# EAGLE board CT_schematic (EAGLE 7.6.0)

Size 100 x 80 mm. Coordinates in mm from the lower left corner, seen from the top.
Outline: 0,0 100,0 100,80 0,80 0,0
Copper layers (1*16): Top 0.035mm / dielectric 1.5mm / Bottom 0.035mm
Design rules "default": minimum track width 10mil, minimum drill 24mil, track to track 8mil, track to pad 8mil, pad to pad 8mil, via to via 8mil, smd to smd 8mil, copper to edge 40mil, drill to drill 8mil, minimum pad ring 10mil, minimum via ring 8mil, stop-mask expansion 4mil, vias tented up to drill 0mil, thermal gap 10mil

## Footprints (pad centres in the part's own frame; a part is rotated, then mirrored left to right if it is on the bottom)
C0603 = smd 0.8 x 0.8: 1 -0.762,0; 2 0.762,0
C0402 = smd 0.5 x 0.5: 1 -0.508,0; 2 0.508,0
C1210 = smd 1.2 x 2.5: 1 -1.524,0; 2 1.524,0
R0603 = smd 0.8 x 0.8: 1 -0.762,0; 2 0.762,0
EXV-9H = smd 3.505 x 1.676: 1 -2.857,0; 2 2.857,0
L0603 = smd 0.8 x 0.8: 1 -0.762,0; 2 0.762,0
IND25X25CZ = smd 2.489 x 3.429: 1 -2.718,0; 2 2.718,0
PJ-037B_PACKAGE = drill 3.7 square: 1 12,0 | drill 3.2 square: 2 6,0
LQFP64 = smd 0.3 x 1.2: 1 -3.75,-5.75; 2 -3.25,-5.75; 3 -2.75,-5.75; 4 -2.25,-5.75; 5 -1.75,-5.75; 6 -1.25,-5.75; 7 -0.75,-5.75; 8 -0.25,-5.75; 9 0.25,-5.75; 10 0.75,-5.75; 11 1.25,-5.75; 12 1.75,-5.75; 13 2.25,-5.75; 14 2.75,-5.75; 15 3.25,-5.75; 16 3.75,-5.75; 33 3.75,5.75; 34 3.25,5.75; 35 2.75,5.75; 36 2.25,5.75; 37 1.75,5.75; 38 1.25,5.75; 39 0.75,5.75; 40 0.25,5.75; 41 -0.25,5.75; 42 -0.75,5.75; 43 -1.25,5.75; 44 -1.75,5.75; 45 -2.25,5.75; 46 -2.75,5.75; 47 -3.25,5.75; 48 -3.75,5.75 | smd 1.2 x 0.3: 17 5.75,-3.75; 18 5.75,-3.25; 19 5.75,-2.75; 20 5.75,-2.25; 21 5.75,-1.75; 22 5.75,-1.25; 23 5.75,-0.75; 24 5.75,-0.25; 25 5.75,0.25; 26 5.75,0.75; 27 5.75,1.25; 28 5.75,1.75; 29 5.75,2.25; 30 5.75,2.75; 31 5.75,3.25; 32 5.75,3.75; 49 -5.75,3.75; 50 -5.75,3.25; 51 -5.75,2.75; 52 -5.75,2.25; 53 -5.75,1.75; 54 -5.75,1.25; 55 -5.75,0.75; 56 -5.75,0.25; 57 -5.75,-0.25; 58 -5.75,-0.75; 59 -5.75,-1.25; 60 -5.75,-1.75; 61 -5.75,-2.25; 62 -5.75,-2.75; 63 -5.75,-3.25; 64 -5.75,-3.75
QFN24_2 = smd 0.6 x 0.2: 1 -1.6,1; 2 -1.6,0.6; 3 -1.6,0.2; 4 -1.6,-0.2; 5 -1.6,-0.6; 6 -1.6,-1; 13 1.6,-1; 14 1.6,-0.6; 15 1.6,-0.2; 16 1.6,0.2; 17 1.6,0.6; 18 1.6,1 | smd 0.2 x 0.6: 7 -1,-1.6; 8 -0.6,-1.6; 9 -0.2,-1.6; 10 0.2,-1.6; 11 0.6,-1.6; 12 1,-1.6; 19 1,1.6; 20 0.6,1.6; 21 0.2,1.6; 22 -0.2,1.6; 23 -0.6,1.6; 24 -1,1.6 | smd 1.75 x 1.59: 25 0,0
WNG008 = smd 0.45 x 0.55: 1 -1.27,0; 2 0,0; 3 1.27,0; 4 2.54,0; 5 2.54,7.5; 6 1.27,7.5; 7 0,7.5; 8 -1.27,7.53 | smd 4.9 x 4.75: PAD 0.635,3.75
SMD-8 = smd 0.72 x 0.6: 1 -1.45,-0.7; 2 -0.485,-0.7; 3 0.485,-0.7; 4 1.455,-0.7; 5 1.455,0.7; 6 0.485,0.7; 7 -0.485,0.7; 8 -1.455,0.7
MICRO_USB_AB = smd 0.4 x 1.35: 1 1.3,0.26; 2 0.65,0.26; 3 0,0.26; 4 -0.65,0.26; 5 -1.3,0.26 | drill 0.6 pad 0.95 long: 6 4.175,-2.54; 7 -4.175,-2.54 | drill 0.7 pad 1.1 long: 8 -2.225,0.46; 9 2.225,0.46
SOT143B = smd 1 x 0.7: 1 -0.75,-1 | smd 0.6 x 0.7: 2 0.95,-1; 3 0.95,1; 4 -0.95,1
ABS07-32.768KHZ-7-T = smd 1.1 x 2.4: 1 -2.5,0; 2 0,0
ABLS-25.000MHZ-B2F-T = smd 5.6 x 2.8: 1 -3.81,0; 2 5.69,0
IR3899MTR1PBF = smd 0.25 x 0.75: 1 0,0; 2 0.5,0; 3 1,0; 4 1.5,0; 5 2,0; 6 2.5,0; 7 3,0 | smd 0.75 x 0.25: 8 3.425,0.78; 9 3.425,1.28; 10 3.425,1.78; 14 -0.425,1.78; 15 -0.425,1.28; 16 -0.425,0.78 | smd 0.3 x 1.95: 11 3.22,3.63 | smd 1.62 x 2.42: 12 1.786,3.8 | smd 1 x 1.95: 13 0.117,3.63 | smd 2.19 x 1.25: 17 1.51,1.26
SON-6 = smd 0.55 x 0.3: 1 -0.355,0.5 | smd 0.52 x 0.3: 2 -0.37,0; 3 -0.37,-0.5; 4 0.37,-0.5; 5 0.37,0; 6 0.37,0.5
SW_4-1437565-2 = smd 1.4 x 2.1: 1 -2.23,4.55; 2 -2.23,-4.55; 3 2.23,4.55; 4 2.23,-4.55
LGM67K-G1J2-24-Z = smd 0.8 x 1.4: A -2,0; C 0,0
NC7SZ125M5X = smd 1.3 x 0.7: 1 -1.3,0.95; 2 -1.3,0; 3 -1.3,-0.95; 4 1.3,-0.95; 5 1.3,0.95

## Placement (x,y rotation side)
C1  1e-06  [C0603]  -22.86,54.61 0 top  (outside the outline)
C2  1e-07  [C0603]  -26.67,54.61 0 top  (outside the outline)
C3  1e-07  [C0603]  -30.48,54.61 0 top  (outside the outline)
C4  1e-07  [C0603]  -34.29,54.61 0 top  (outside the outline)
C5  1e-07  [C0603]  -38.1,54.61 0 top  (outside the outline)
C6  1e-07  [C0603]  -41.91,54.61 0 top  (outside the outline)
C7  1e-07  [C0603]  -45.72,54.61 0 top  (outside the outline)
C8  4.7e-06  [C0603]  -15.24,54.61 0 top  (outside the outline)
C9  1e-08  [C0603]  -49.53,54.61 0 top  (outside the outline)
C10  1e-06  [C0603]  -53.34,54.61 0 top  (outside the outline)
C11  1e-11  [C0402]  -57.15,59.69 0 top  (outside the outline)
C12  1e-11  [C0402]  -60.96,59.69 0 top  (outside the outline)
C13  1e-11  [C0402]  -64.77,59.69 0 top  (outside the outline)
C14  1e-11  [C0402]  -15.24,64.77 0 top  (outside the outline)
C15  1e-07  [C0402]  -19.05,64.77 0 top  (outside the outline)
C16  1e-07  [C0402]  -22.86,64.77 0 top  (outside the outline)
C17  1e-08  [C0402]  -26.67,64.77 0 top  (outside the outline)
C18  1e-08  [C0402]  -30.48,64.77 0 top  (outside the outline)
C19  1e-06  [C0603]  -57.15,54.61 0 top  (outside the outline)
C20  1e-06  [C0603]  -60.96,54.61 0 top  (outside the outline)
C21  0.0001  [C1210]  -48.26,38.1 0 top  (outside the outline)
C22  2.2e-06  [C0603]  -19.05,54.61 0 top  (outside the outline)
C23  1e-07  [C0402]  -34.29,64.77 0 top  (outside the outline)
C24  1e-07  [C0402]  -38.1,64.77 0 top  (outside the outline)
C25  8.8006443804346e-09  [R0603]  -20.32,44.45 0 top  (outside the outline)
C26  3.0002196751482e-07  [R0603]  -30.48,44.45 0 top  (outside the outline)
C29  1e-07  [C0402]  -41.91,64.77 0 top  (outside the outline)
C30  0.0001  [EXV-9H]  -17.78,30.48 0 top  (outside the outline)
C31  0.0001  [EXV-9H]  -29.21,30.48 0 top  (outside the outline)
C32  1e-08  [C0402]  -45.72,64.77 0 top  (outside the outline)
F1  240.0  [L0603]  -64.77,54.61 0 top  (outside the outline)
I1  6.8e-07  [IND25X25CZ]  -59.69,30.48 0 top  (outside the outline)
J1  PJ-037B  [PJ-037B_PACKAGE]  -27.94,7.62 0 top  (outside the outline)
R2  1000.0  [R0603]  -15.24,59.69 0 top  (outside the outline)
R4  4700.0  [R0603]  -19.05,59.69 0 top  (outside the outline)
R5  2200.0  [R0603]  -22.86,59.69 0 top  (outside the outline)
R6  2200.0  [R0603]  -26.67,59.69 0 top  (outside the outline)
R7  2200.0  [R0603]  -30.48,59.69 0 top  (outside the outline)
R8  2200.0  [R0603]  -34.29,59.69 0 top  (outside the outline)
R9  10000.0  [R0603]  -15.24,49.53 0 top  (outside the outline)
R10  10000.0  [R0603]  -20.32,49.53 0 top  (outside the outline)
R11  10000.0  [R0603]  -25.4,49.53 0 top  (outside the outline)
R12  10000.0  [R0603]  -30.48,49.53 0 top  (outside the outline)
R13  10000.0  [R0603]  -35.56,49.53 0 top  (outside the outline)
R14  10000.0  [R0603]  -40.64,49.53 0 top  (outside the outline)
R15  10000.0  [R0603]  -45.72,49.53 0 top  (outside the outline)
R16  22.0  [R0603]  -38.1,59.69 0 top  (outside the outline)
R17  0.1  [R0603]  -41.91,59.69 0 top  (outside the outline)
R18  4030.2416170974  [R0603]  -38.1,44.45 0 top  (outside the outline)
R19  719.68600305311  [R0603]  -45.72,44.45 0 top  (outside the outline)
R20  57.923764705882  [R0603]  -53.34,44.45 0 top  (outside the outline)
R21  130.0  [R0603]  -45.72,59.69 0 top  (outside the outline)
R22  39000.0  [R0603]  -50.8,49.53 0 top  (outside the outline)
R23  49900.0  [R0603]  -55.88,49.53 0 top  (outside the outline)
R24  5100.0  [R0603]  -49.53,59.69 0 top  (outside the outline)
R25  10000.0  [R0603]  -60.96,49.53 0 top  (outside the outline)
R26  10000.0  [R0603]  -66.04,49.53 0 top  (outside the outline)
R27  9100.0  [R0603]  -53.34,59.69 0 top  (outside the outline)
R28  680000.0  [R0603]  -58.42,44.45 0 top  (outside the outline)
R29  120000.0  [R0603]  -63.5,44.45 0 top  (outside the outline)
U1  stm32f105rct6  [LQFP64]  -38.1,7.62 0 top  (outside the outline)
U2  MPU-9250  [QFN24_2]  -66.04,36.83 0 top  (outside the outline)
U3  S25FL128SDPNFI001  [WNG008]  -48.26,17.78 0 top  (outside the outline)
U4  TMD27711  [SMD-8]  -60.96,36.83 0 top  (outside the outline)
U5  47590-0001  [MICRO_USB_AB]  -52.07,7.62 0 top  (outside the outline)
U6  prtr5v0u2ax  [SOT143B]  -58.42,64.77 0 top  (outside the outline)
U7  ABS07-32.768KHZ-7-T  [ABS07-32.768KHZ-7-T]  -27.94,38.1 0 top  (outside the outline)
U8  ABLS-25.000MHZ-B2F-T  [ABLS-25.000MHZ-B2F-T]  -48.26,30.48 0 top  (outside the outline)
U9  IR3899MTR1PBF  [IR3899MTR1PBF]  -63.5,17.78 0 top  (outside the outline)
U10  TPS3895ADRYR  [SON-6]  -62.23,63.5 0 top  (outside the outline)
U11  4-1437565-2  [SW_4-1437565-2]  -27.94,20.32 0 top  (outside the outline)
U12  Q65110A2395  [LGM67K-G1J2-24-Z]  -36.83,38.1 0 top  (outside the outline)
U13  nc7sz125m5x  [NC7SZ125M5X]  -53.34,36.83 0 top  (outside the outline)

## Library data of the parts
C1-C26 C29-C32 F1 I1 J1 R2 R4-R29 U1-U13 = circuit_tree

## Nets
CLK_CRYSTAL_U1_3: C11.1 U1.3 U7.1
CLK_CRYSTAL_U1_4: C12.1 U1.4 U7.2
CLK_CRYSTAL_U1_5: C13.1 U1.5 U8.1
CLK_CRYSTAL_U1_6: C14.1 U1.6 U8.2
GND: C1.2 C2.2 C3.2 C4.2 C5.2 C6.2 C7.2 C8.2 C9.2 C10.2 C11.2 C12.2 C13.2 C14.2 C15.2 C16.2 C17.2 C18.2 C19.2 C20.2 C22.2 C23.2 C24.2 C29.2 C30.2 C31.2 C32.2 J1.2 R2.2 R9.2 R17.1 R17.2 R19.2 R22.2 R24.2 R27.2 R29.2 U1.12 U1.18 U1.31 U1.47 U1.63 U2.18 U2.20 U2.25 U3.4 U3.PAD U4.3 U5.5 U5.6 U5.7 U5.8 U5.9 U6.1 U9.4 U9.11 U9.17 U10.2 U12.C U13.1 U13.3
NET_U1_7: R4.1 U1.7 U13.4
NET_U1_13: C9.1 C10.1 F1.1 U1.13
NET_U1_29: R7.1 U1.29 U4.2
NET_U1_30: R8.1 U1.30 U4.8
NET_U1_58: R5.1 U1.58 U2.23
NET_U1_59: R6.1 U1.59 U2.24
NET_U1_60: R9.1 U1.60
NET_U1_61: U12.A
NET_U1_62: U11.3 U11.4
NET_U2_9: R11.1 U2.9
NET_U2_10: C15.1 U2.10
NET_U2_22: R10.1 U2.22
NET_U3_3: R12.1 U3.3
NET_U3_7: R14.1 U3.7
NET_U4_4: C20.1 R16.1 U4.4
NET_U4_5: U4.5
NET_U4_6: U4.6
NET_U4_7: R15.1 U4.7
NET_U9_1: C25.1 R18.1 R19.1 R20.1 R21.1 U9.1 U9.8
NET_U9_2: C24.1 U9.2
NET_U9_3: C25.2 C26.1 C26.2 U9.3
NET_U9_5: R22.1 U9.5
NET_U9_10: C22.1 U9.10
NET_U9_12: C21.1 I1.1 U9.12
NET_U9_13: U9.13
NET_U9_14: C21.2 U9.14
NET_U9_15: R23.1 R24.1 U9.15
NET_U9_ATNET_3: I1.2 R18.2
NET_U9_ATNET_4: C26.2 R20.2
NET_U9_ATNET_5: R21.2
NET_U10_1: R26.1 R27.1 U10.1
NET_U10_3: R28.2 R29.1 U10.3
NET_U10_4: R25.1 U10.4 U13.2
NET_U11_1: R2.1 U11.1 U11.2
PROC_GPIO_TO_U2_FSYNC: U1.8 U2.11
PROC_GPIO_TO_U2_INT_B: U1.2 U2.12
PROC_SPI1_MISO: U1.22 U3.2
PROC_SPI1_MOSI: U1.23 U3.5
PROC_SPI1_NSS: R13.1 U1.20 U3.1
PROC_SPI1_SCK: U1.21 U3.6
PROC_USB_OTG_FS_DM: U1.44 U5.2 U6.3
PROC_USB_OTG_FS_DP: U1.45 U5.3 U6.2
PROC_USB_OTG_FS_ID: U1.43 U5.4
PROC_USB_OTG_FS_VBUS: U1.42 U5.1 U6.4
VCC_S1_17V0: C23.1 C30.1 C31.1 J1.1 R23.2 U9.9
VCC_TIER1_3V3: C1.1 C2.1 C3.1 C4.1 C5.1 C6.1 C7.1 C8.1 C16.1 C17.1 C18.1 C19.1 C29.1 C32.1 F1.2 I1.2 R4.2 R5.2 R6.2 R7.2 R8.2 R10.2 R11.2 R12.2 R13.2 R14.2 R15.2 R16.2 R18.2 R25.2 R26.2 R28.1 U1.1 U1.19 U1.32 U1.48 U1.64 U2.1 U2.8 U2.13 U3.8 U4.1 U10.6 U13.5

## Tracks (layer width: path | path; a pad name or v marks a point on that pad's centre or on a via)
CLK_CRYSTAL_U1_3  (2 unrouted)
CLK_CRYSTAL_U1_4  (2 unrouted)
CLK_CRYSTAL_U1_5  (2 unrouted)
CLK_CRYSTAL_U1_6  (2 unrouted)
GND  (60 unrouted)
NET_U1_7  (2 unrouted)
NET_U1_13  (3 unrouted)
NET_U1_29  (2 unrouted)
NET_U1_30  (2 unrouted)
NET_U1_58  (2 unrouted)
NET_U1_59  (2 unrouted)
NET_U1_60  (1 unrouted)
NET_U1_62  (1 unrouted)
NET_U2_9  (1 unrouted)
NET_U2_10  (1 unrouted)
NET_U2_22  (1 unrouted)
NET_U3_3  (1 unrouted)
NET_U3_7  (1 unrouted)
NET_U4_4  (2 unrouted)
NET_U4_7  (1 unrouted)
NET_U9_1  (6 unrouted)
NET_U9_2  (1 unrouted)
NET_U9_3  (3 unrouted)
NET_U9_5  (1 unrouted)
NET_U9_10  (1 unrouted)
NET_U9_12  (2 unrouted)
NET_U9_14  (1 unrouted)
NET_U9_15  (2 unrouted)
NET_U9_ATNET_3  (1 unrouted)
NET_U9_ATNET_4  (1 unrouted)
NET_U10_1  (2 unrouted)
NET_U10_3  (2 unrouted)
NET_U10_4  (2 unrouted)
NET_U11_1  (2 unrouted)
PROC_GPIO_TO_U2_FSYNC  (1 unrouted)
PROC_GPIO_TO_U2_INT_B  (1 unrouted)
PROC_SPI1_MISO  (1 unrouted)
PROC_SPI1_MOSI  (1 unrouted)
PROC_SPI1_NSS  (2 unrouted)
PROC_SPI1_SCK  (1 unrouted)
PROC_USB_OTG_FS_DM  (2 unrouted)
PROC_USB_OTG_FS_DP  (2 unrouted)
PROC_USB_OTG_FS_ID  (1 unrouted)
PROC_USB_OTG_FS_VBUS  (2 unrouted)
VCC_S1_17V0  (5 unrouted)
VCC_TIER1_3V3  (43 unrouted)